# Altium PCB MARLIN.PcbDoc
Units mil, origin at the board's own origin, x right, y up, seen from the top; angles counter-clockwise.
Board outline 4120.29 x 4199.02 mil, 4 copper layers (Signal Layer 1, Signal Layer 2, Signal Layer 3, Signal Layer 4), stack 93.512 mil thick; 1 components, 2 nets, 7 pads, 42 vias.
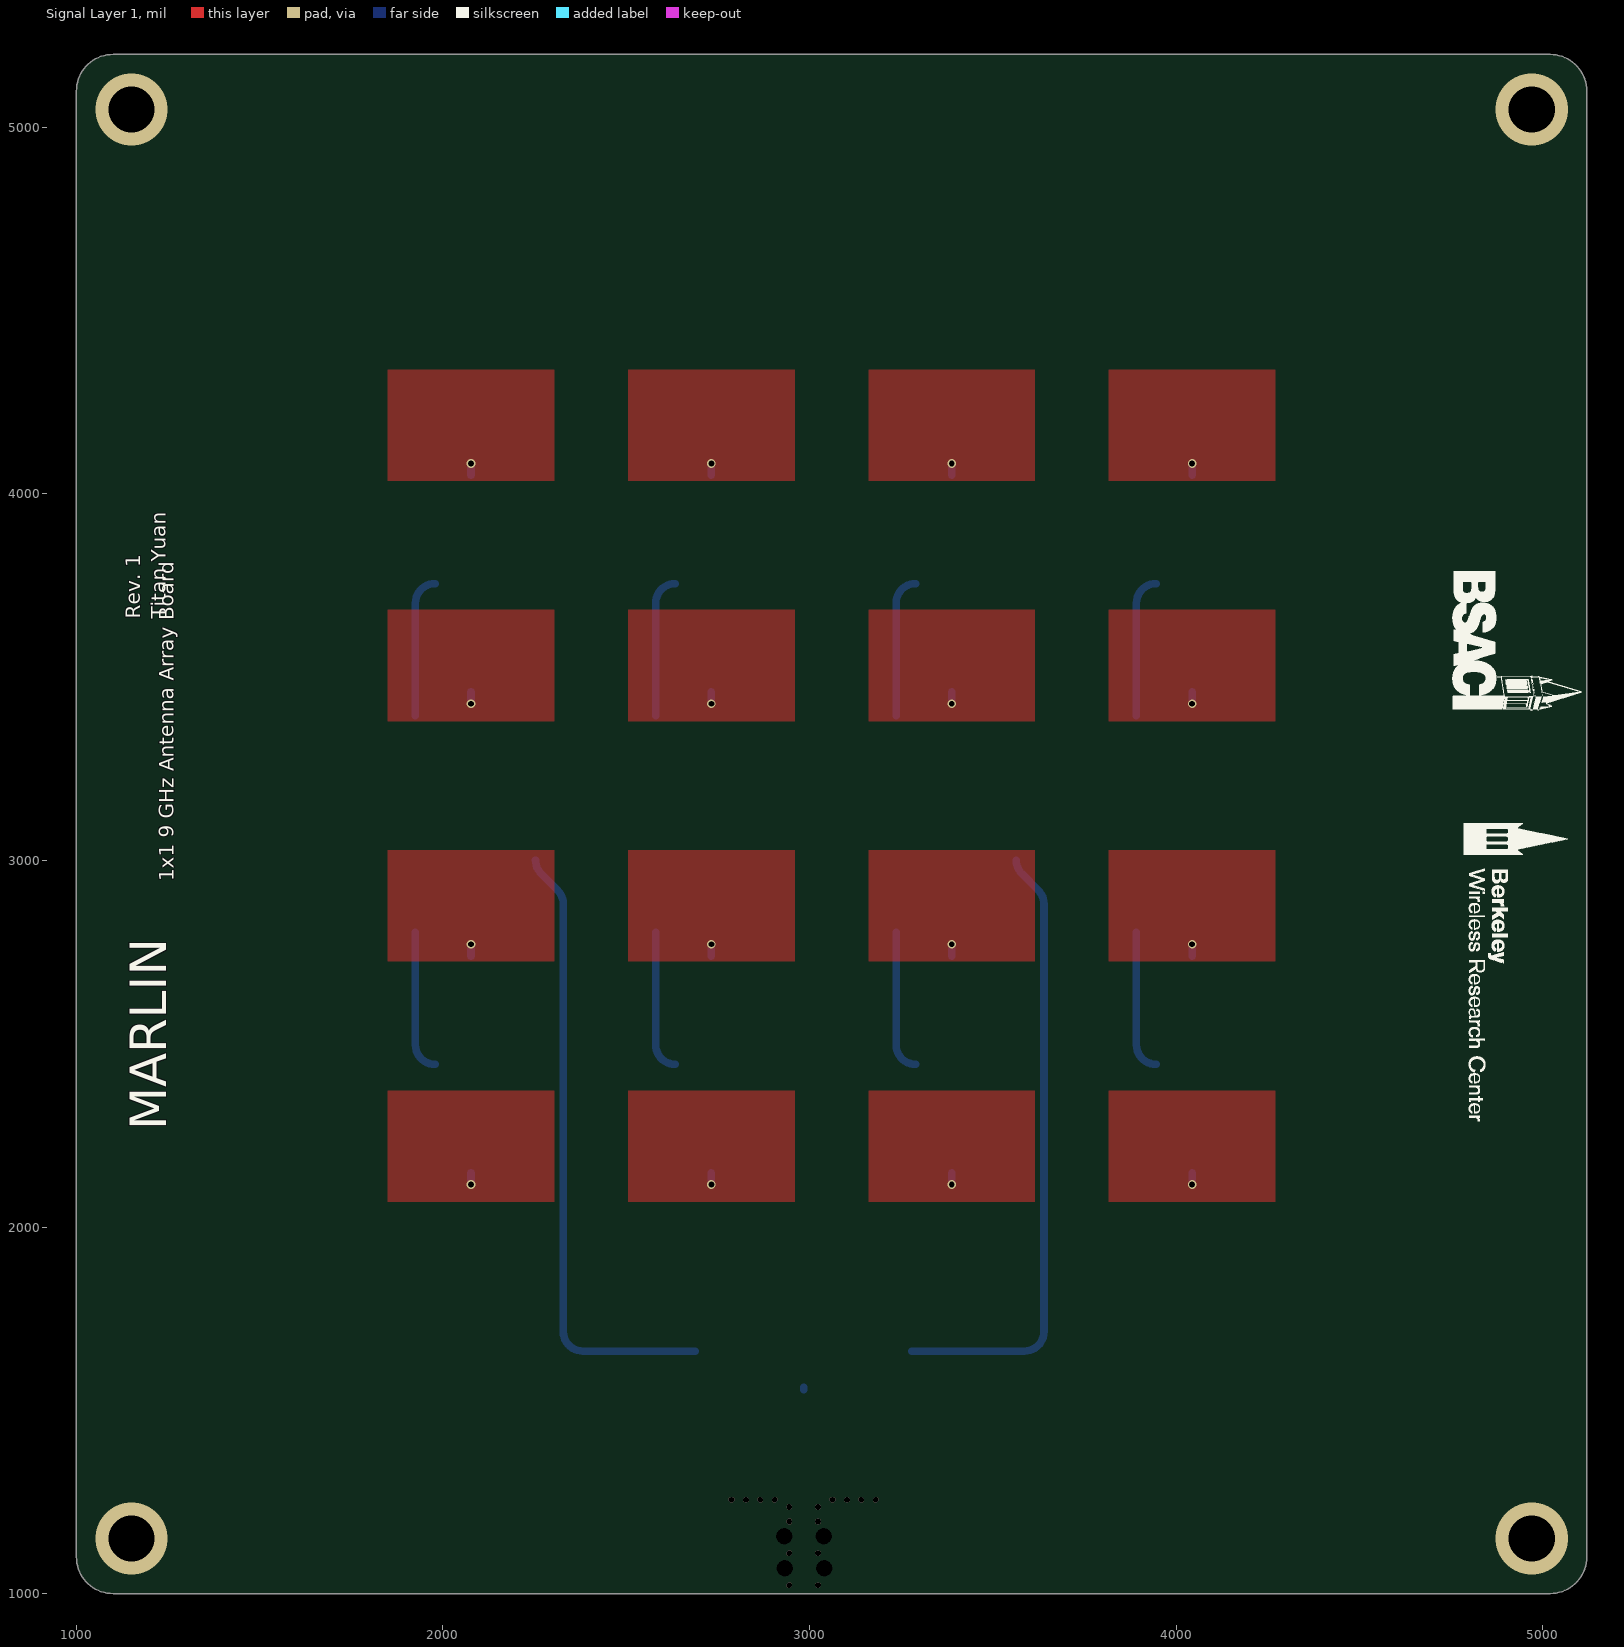
[diagram p0: Signal Layer 1 view]
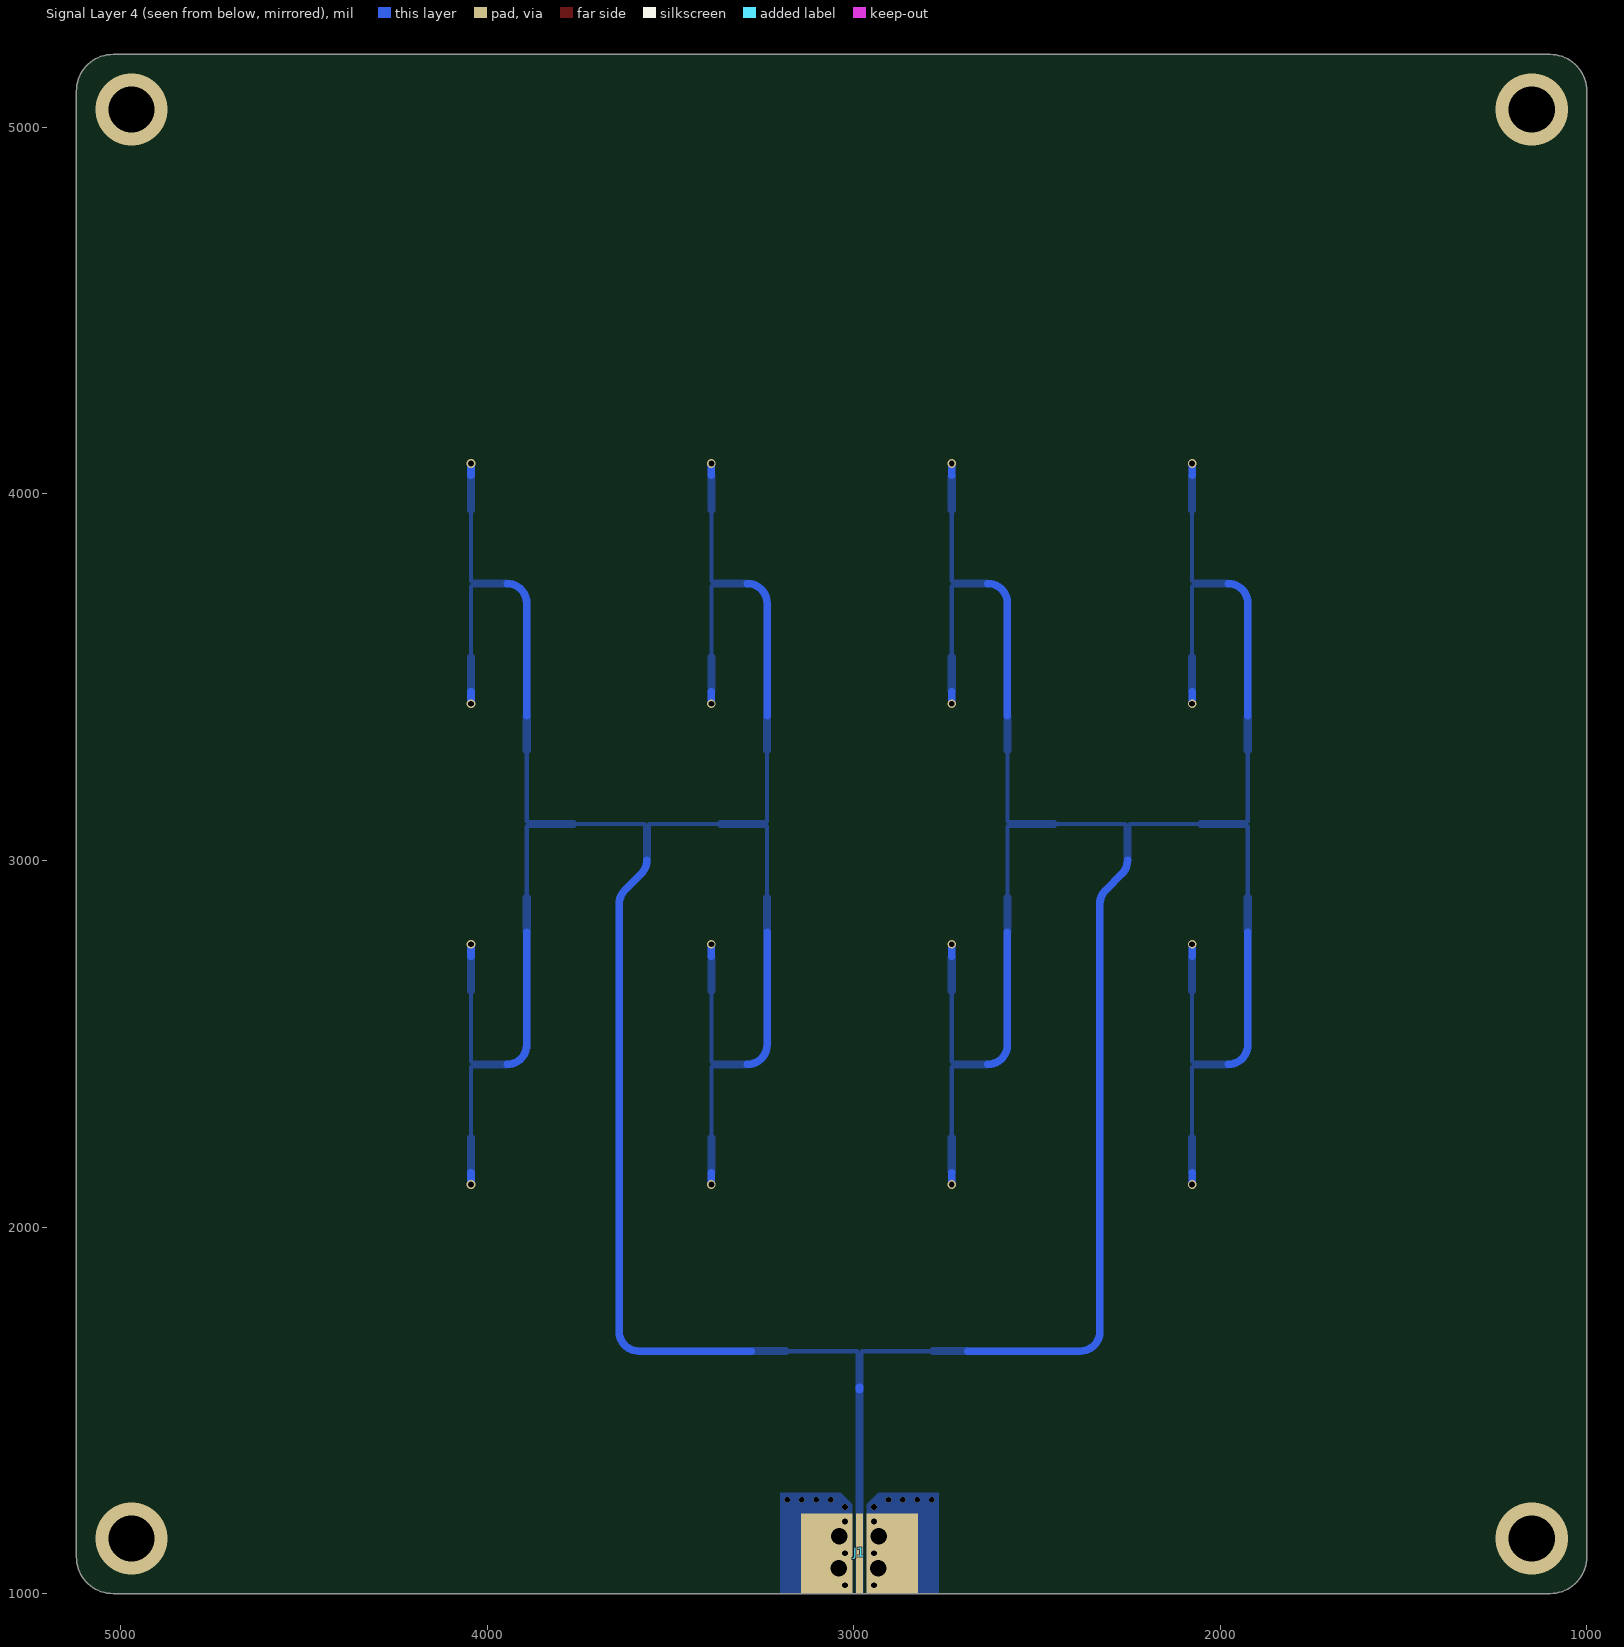
[diagram p1: Signal Layer 4 view, seen from below]
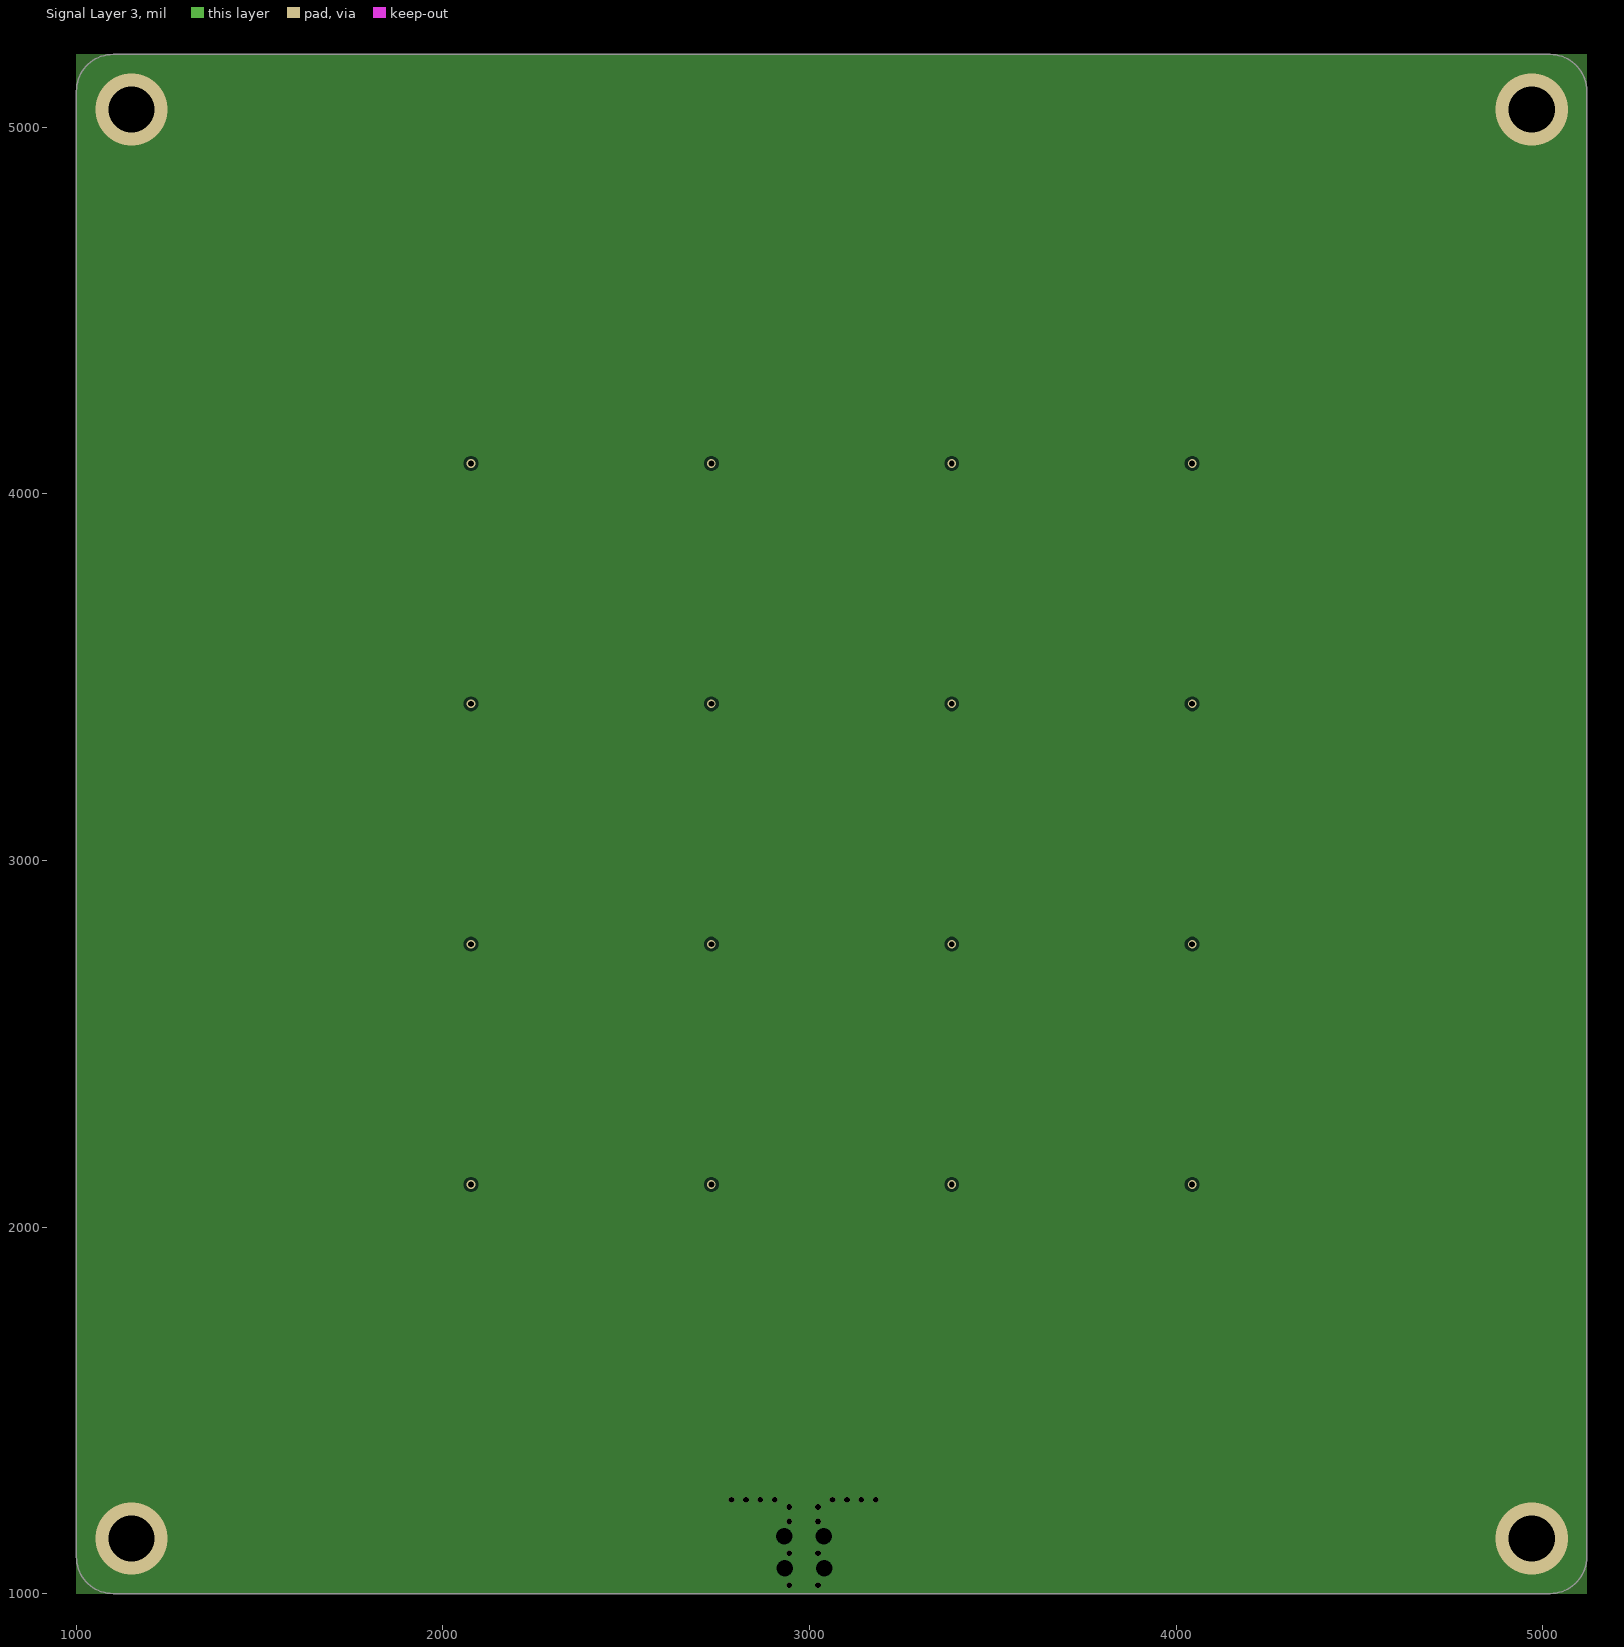
[diagram p2: Signal Layer 3]

## Layer stack, top to bottom
Top Solder: solder mask 0.5, Solder Resist, Dk 3.5
Signal Layer 1: signal copper 1.378
Core 1: core 60, Rogers RO4350B, Dk 3.48
Signal Layer 2: signal copper 1.378
Prepreg 1: prepreg 18, Rogers RO4450F Prepreg, Dk 3.52
Signal Layer 3: signal copper 1.378
Core 2: core 10, Rogers RO4350B, Dk 3.48
Signal Layer 4: signal copper 1.378
Bottom Solder: solder mask 0.5, Solder Resist, Dk 3.5

## Board outline
1100,1000 cw(c1100,1100) 1000,1100 1000,5099.02 cw(c1100,5099.02) 1100,5199.02 5020.28,5199.02 5020.29,5199.02 cw(c5020.29,5099.02) 5120.29,5099.02 5120.29,1099.72 5120.29,1100 cw(c5020.29,1100) 5020.29,1000

## Design rules (kind name [scope] priority, off if disabled: settings)
Clearance [All] p1: gap=7.87 ignorepadtopadclearanceinfootprint=FALSE except(0: Arc-Fill Arc-Poly Arc-Region Track-Fill Track-Poly Track-Region)
PolygonConnect [All] p1: connectstyle=Direct reliefconductorwidth=10 reliefentries=4 polygonreliefangle="90 Angle" airgapwidth=10
RoutingVias [All] p1: holewidth=28 width=50 viastyle="Through Hole" minholewidth=28 minwidth=50 maxholewidth=28 maxwidth=50
SolderMaskExpansion [All] p1: expansion=0 istentingtop=FALSE
SupplyNets "Schematic Supply Nets" [InNet('GND')] p1: voltage=0.000
Width "50 Ω" [InNetClass('50 Ω')] p1: maxlimit=20.76 minlimit=20.76 preferedwidth=20.76
Width [All] p2: maxlimit=10 minlimit=10 preferedwidth=10
30 further rules are at their usual default settings.

## Classes and differential pairs
net class "50 Ω": ANTENNA_1

## Components (designator, comment, footprint, x,y, rotation, side; value= is the part's Value field where it differs from the comment)
J1 "901-10512-1" 901-10512-1 2983.9,1000 r90 bottom

## Footprints (in the part's own frame and the unit in brackets; to place one, negate y for a bottom-side part, rotate by r counter-clockwise, add the part's x,y. Pads: shape width x height; smd on the part's side, far side on the other; paste and mask are expansions set on the pad)
901-10512-1 [mm] "SMA PCB End Launch Straight Jack 50 Ohm 0.085 Square Flange High Frequency 0.015 Pin"
  rect 5.54x0.49 smd: 1(2.77,0)
  round 0 hole 1.14: 2(1.75,-1.3) 2(1.75,1.435) 2(3.96,-1.335) 2(3.96,1.4)
  rect 5.54x3.564 smd: 2(2.77,-2.283) 2(2.77,2.283)
  body extent -9.53,-3.18 4.55,3.18, height 3.36

## Part data
J1: "RF / Coaxial Connector, SMA Coaxial, Straight Flanged Jack, Solder, 50 ohm, Beryllium Copper", Case/Package=SMA, Clock Frequency=26.5GHz, Manufacturer=Amphenol, Max Operating Temperature=165°C, Maximum Frequency="26.5 GHz", Min Operating Temperature=-65°C, Supplier Part Number=ARF2501-ND, Voltage Rating=170V, Category="RF / Coaxial Connectors", ComponentLink1Description=https://datasheet.octopart.com:443/901-10512-1-Amphenol-RF-datasheet-67291281.pdf?src-supplier=TME, ComponentLink1URL=https://datasheet.octopart.com:443/901-10512-1-Amphenol-RF-datasheet-67291281.pdf?src-supplier=TME, ComponentLink2Description=https://datasheet.octopart.com:443/901-10512-1-Amphenol-datasheet-151206439.pdf?src-supplier=IHS, ComponentLink2URL=https://datasheet.octopart.com:443/901-10512-1-Amphenol-datasheet-151206439.pdf?src-supplier=IHS, ComponentLink3Description=https://datasheet.octopart.com:443/901-10512-1-Amphenol-RF-datasheet-67291285.pdf?src-supplier=Newark, ComponentLink3URL=https://datasheet.octopart.com:443/901-10512-1-Amphenol-RF-datasheet-67291285.pdf?src-supplier=Newark, ComponentLink4Description=https://datasheet.octopart.com:443/901-10512-1-Amphenol-RF-datasheet-114836026.pdf?src-supplier=RS+(Formerly+Allied+Electronics), ComponentLink4URL=https://datasheet.octopart.com:443/901-10512-1-Amphenol-RF-datasheet-114836026.pdf?src-supplier=RS+(Formerly+Allied+Electronics), ComponentLink5Description=https://datasheet.octopart.com:443/901-10512-1-Amphenol-RF-datasheet-177020667.pdf?src-supplier=Burklin+Elektronik, ComponentLink5URL=https://datasheet.octopart.com:443/901-10512-1-Amphenol-RF-datasheet-177020667.pdf?src-supplier=Burklin+Elektronik, ComponentLink6Description=https://datasheet.octopart.com:443/901-10512-1-Amphenol-RF-datasheet-181430700.pdf?src-supplier=JRH+Electronics, ComponentLink6URL=https://datasheet.octopart.com:443/901-10512-1-Amphenol-RF-datasheet-181430700.pdf?src-supplier=JRH+Electronics, Connector Type="SMA, Socket", Contact Material=Copper, Fastening Type=Threaded, Impedance=50Ω, Lifecycle Status=Production, Manufacturer Part Number=901-10512-1, Mounting Technology="Edge, Through Hole", Orientation=Straight, Pricing="1=11.3, 10=9.599, 25=8.9976, 50=8.568, 100=8.159, 300=7.55083, 500=7.28374, 1000=6.93654 (USD)", RoHS=Compliant, Stock=96, Supplier=DigiKey, Termination=Solder

## Via types
v1: diameter 15.75, hole 15.75, Signal Layer 1 to Signal Layer 4, tented both sides, 16 vias
v2: diameter 23.62, hole 15.75, Signal Layer 1 to Signal Layer 4, tented both sides, 16 vias
v3: diameter 15.75, hole 15.75, Signal Layer 1 to Signal Layer 4, 6 vias
v4: diameter 196.85, hole 125.98, Signal Layer 1 to Signal Layer 4, 4 vias

## Nets (pads, with @x,y where several pads share a name; then routed paths per layer and width w, separated by ;. In a path a pad name is that pad's centre, name@x,y a point inside that pad or via, vN(x,y) a via of type N, cw(c..) or ccw(c..) an arc to the next point about the centre after c; other vN are vias at no path point)
ANTENNA_1: J1.1 | length 7064.6
  Signal Layer 4 w20.76: 1924.72,2804.28 1924.72,2497.25 ccw(c1978.15,2497.25) 1978.15,2443.82 ; 1924.72,3394.83 1924.72,3701.84 cw(c1978.15,3701.84) 1978.15,3755.27 ; v2@2076.47,2116.09 v2(2076.57,2115.98) 2076.57,2148.55 ; v2@2076.47,4083 v2(2076.57,4083.11) 2076.57,4050.55 ; 2076.57,2739.1 v2(2076.57,2771.69) ; v2(2076.57,3427.4) 2076.57,3460 ; 2252.57,3001.13 ccw(c2306,3001.13) 2268.22,2963.35 2312.54,2919.03 cw(c2274.76,2881.25) 2328.19,2881.25 2328.19,1714.85 ccw(c2381.62,1714.85) 2381.62,1661.42 2688.62,1661.42 ; 2580.43,2804.28 2580.43,2497.25 ccw(c2633.86,2497.25) 2633.86,2443.82 ; 2580.43,3394.83 2580.43,3701.84 cw(c2633.86,3701.84) 2633.86,3755.27 ; v2@2732.18,2116.09 v2(2732.28,2115.98) 2732.28,2148.55 ; v2@2732.18,4083 v2(2732.28,4083.11) 2732.28,4050.55 ; 2732.28,2739.1 v2(2732.28,2771.69) ; v2(2732.28,3427.4) 2732.28,3460 ; 2983.9,1556.3 2983.9,1562.99 ; 3236.14,2804.28 3236.14,2497.25 ccw(c3289.57,2497.25) 3289.57,2443.82 ; 3236.14,3394.83 3236.14,3701.84 cw(c3289.57,3701.84) 3289.57,3755.27 ; 3279.17,1661.42 3586.18,1661.42 ccw(c3586.18,1714.85) 3639.61,1714.85 3639.61,2881.25 ccw(c3586.18,2881.25) 3623.96,2919.03 3579.64,2963.35 cw(c3617.42,3001.13) 3563.99,3001.13 ; v2@3387.88,2116.09 v2(3387.99,2115.98) 3387.99,2148.55 ; v2@3387.88,4083 v2(3387.99,4083.11) 3387.99,4050.55 ; 3387.99,2739.1 v2(3387.99,2771.69) ; v2(3387.99,3427.4) 3387.99,3460 ; 3891.85,2804.28 3891.85,2497.25 ccw(c3945.28,2497.25) 3945.28,2443.82 ; 3891.85,3394.83 3891.85,3701.84 cw(c3945.28,3701.84) 3945.28,3755.27 ; v2@4043.59,2116.09 v2(4043.7,2115.98) 4043.7,2148.55 ; v2@4043.59,4083 v2(4043.7,4083.11) 4043.7,4050.55 ; 4043.7,2739.1 v2(4043.7,2771.69) ; v2(4043.7,3427.4) 4043.7,3460
GND: J1.2
  other v1: 2944.49,1022.83 3023.31,1022.83 2944.49,1109.84 3023.31,1109.84 2944.49,1196.85 3023.31,1196.85 2944.49,1236.22 3023.31,1236.22 2787.01,1255.91 2826.38,1255.91 2865.75,1255.91 2905.12,1255.91 3062.68,1255.91 3102.05,1255.91 3141.42,1255.91 3180.79,1255.91
  other v3: 2944.49,1022.83 3023.31,1022.83 2944.49,1109.84 3023.31,1109.84 2944.49,1196.85 3023.31,1196.85
  other v4: 1150,1150 4970.29,1150 1150,5049.02 4970.29,5049.02

## Polygon pours and split planes (outlines as drawn)
GND on Signal Layer 4 "GND_L04_P230" (solid, pour order 230): 2767.32,1000 2767.32,1275.59 2932.68,1275.59 2964.17,1244.09 2964.17,1000
GND on Signal Layer 4 "GND_L04_P231" (solid, pour order 231): 3003.62,1155.91 3003.62,1244.09 3035.12,1275.59 3200.47,1275.59 3200.47,1000 3003.62,1000
ANTENNA_1 on Signal Layer 4 "ANTENNA_1_L04_P232" (solid, pour order 232): 2974.25,1244.09 2973.52,1244.83 2973.52,1556.3 2994.28,1556.3 2994.28,1244.83 2993.54,1244.09 2993.54,1000 2974.25,1000
ANTENNA_1 on Signal Layer 4 "ANTENNA_1_L04_P276" (solid, pour order 276): 2973.52,1562.99 2994.28,1562.99 2994.28,1661.42 2973.52,1661.42
ANTENNA_1 on Signal Layer 4 "ANTENNA_1_L04_P277" (solid, pour order 277): 2983.9,1661.42 2989.04,1656.28 3175.45,1656.28 3180.69,1651.04 3279.17,1651.04 3279.17,1671.8 3180.69,1671.8 3175.45,1666.56 2989.04,1666.56
ANTENNA_1 on Signal Layer 4 "ANTENNA_1_L04_P278" (solid, pour order 278): 2688.62,1651.04 2688.62,1671.8 2787.1,1671.8 2792.34,1666.56 2978.76,1666.56 2983.9,1661.42 2978.76,1656.28 2792.34,1656.28 2787.1,1651.04
ANTENNA_1 on Signal Layer 4 "ANTENNA_1_L04_P255" (solid, pour order 255): 3387.99,2443.82 3382.85,2438.69 3382.85,2252.27 3377.61,2247.03 3377.61,2148.55 3398.37,2148.55 3398.37,2247.03 3393.13,2252.27 3393.13,2438.69
ANTENNA_1 on Signal Layer 4 "ANTENNA_1_L04_P274" (solid, pour order 274): 3268.72,3089.18 3268.72,3109.93 3367.2,3109.93 3372.44,3104.69 3558.85,3104.69 3563.99,3099.56 3558.85,3094.42 3372.44,3094.42 3367.2,3089.18
ANTENNA_1 on Signal Layer 4 "ANTENNA_1_L04_P273" (solid, pour order 273): 3563.99,3099.56 3569.13,3094.42 3755.55,3094.42 3760.79,3089.18 3859.27,3089.18 3859.27,3109.93 3760.79,3109.93 3755.55,3104.69 3569.13,3104.69
ANTENNA_1 on Signal Layer 4 "ANTENNA_1_L04_P272" (solid, pour order 272): 3553.61,3001.13 3574.37,3001.13 3574.37,3099.56 3553.61,3099.56
ANTENNA_1 on Signal Layer 4 "ANTENNA_1_L04_P271" (solid, pour order 271): 1957.3,3089.18 1957.3,3109.93 2055.78,3109.93 2061.02,3104.69 2247.44,3104.69 2252.57,3099.56 2247.44,3094.42 2061.02,3094.42 2055.78,3089.18
ANTENNA_1 on Signal Layer 4 "ANTENNA_1_L04_P270" (solid, pour order 270): 2252.57,3099.56 2257.71,3094.42 2444.13,3094.42 2449.37,3089.18 2547.85,3089.18 2547.85,3109.93 2449.37,3109.93 2444.13,3104.69 2257.71,3104.69
ANTENNA_1 on Signal Layer 4 "ANTENNA_1_L04_P269" (solid, pour order 269): 2242.2,3001.13 2262.95,3001.13 2262.95,3099.56 2242.2,3099.56
ANTENNA_1 on Signal Layer 4 "ANTENNA_1_L04_P233" (solid, pour order 233): 2023.15,3089.18 2023.15,3109.93 1924.72,3109.93 1924.72,3089.18
ANTENNA_1 on Signal Layer 4 "ANTENNA_1_L04_P234" (solid, pour order 234): 1924.72,3099.56 1929.86,3104.69 1929.86,3291.11 1935.1,3296.35 1935.1,3394.83 1914.34,3394.83 1914.34,3296.35 1919.58,3291.11 1919.58,3104.69
ANTENNA_1 on Signal Layer 4 "ANTENNA_1_L04_P235" (solid, pour order 235): 1935.1,2804.28 1914.34,2804.28 1914.34,2902.76 1919.58,2908 1919.58,3094.42 1924.72,3099.56 1929.86,3094.42 1929.86,2908 1935.1,2902.76
ANTENNA_1 on Signal Layer 4 "ANTENNA_1_L04_P268" (solid, pour order 268): 4033.32,4050.55 4054.08,4050.55 4054.08,3952.07 4048.84,3946.83 4048.84,3760.41 4043.7,3755.27 4038.56,3760.41 4038.56,3946.83 4033.32,3952.07
ANTENNA_1 on Signal Layer 4 "ANTENNA_1_L04_P267" (solid, pour order 267): 4043.7,3755.27 4038.56,3750.13 4038.56,3563.72 4033.32,3558.48 4033.32,3460 4054.08,3460 4054.08,3558.48 4048.84,3563.72 4048.84,3750.13
ANTENNA_1 on Signal Layer 4 "ANTENNA_1_L04_P266" (solid, pour order 266): 3945.28,3765.65 3945.28,3744.89 4043.7,3744.89 4043.7,3765.65
ANTENNA_1 on Signal Layer 4 "ANTENNA_1_L04_P265" (solid, pour order 265): 4033.32,2739.1 4054.08,2739.1 4054.08,2640.62 4048.84,2635.38 4048.84,2448.96 4043.7,2443.82 4038.56,2448.96 4038.56,2635.38 4033.32,2640.62
ANTENNA_1 on Signal Layer 4 "ANTENNA_1_L04_P264" (solid, pour order 264): 4043.7,2443.82 4038.56,2438.69 4038.56,2252.27 4033.32,2247.03 4033.32,2148.55 4054.08,2148.55 4054.08,2247.03 4048.84,2252.27 4048.84,2438.69
ANTENNA_1 on Signal Layer 4 "ANTENNA_1_L04_P263" (solid, pour order 263): 3945.28,2454.2 3945.28,2433.45 4043.7,2433.45 4043.7,2454.2
ANTENNA_1 on Signal Layer 4 "ANTENNA_1_L04_P262" (solid, pour order 262): 3881.47,3394.83 3902.23,3394.83 3902.23,3296.35 3896.98,3291.11 3896.98,3104.69 3891.85,3099.56 3886.71,3104.69 3886.71,3291.11 3881.47,3296.35
ANTENNA_1 on Signal Layer 4 "ANTENNA_1_L04_P261" (solid, pour order 261): 3891.85,3099.56 3886.71,3094.42 3886.71,2908 3881.47,2902.76 3881.47,2804.28 3902.23,2804.28 3902.23,2902.76 3896.98,2908 3896.98,3094.42
ANTENNA_1 on Signal Layer 4 "ANTENNA_1_L04_P260" (solid, pour order 260): 3793.42,3109.93 3793.42,3089.18 3891.85,3089.18 3891.85,3109.93
ANTENNA_1 on Signal Layer 4 "ANTENNA_1_L04_P259" (solid, pour order 259): 3377.61,4050.55 3398.37,4050.55 3398.37,3952.07 3393.13,3946.83 3393.13,3760.41 3387.99,3755.27 3382.85,3760.41 3382.85,3946.83 3377.61,3952.07
ANTENNA_1 on Signal Layer 4 "ANTENNA_1_L04_P258" (solid, pour order 258): 3387.99,3755.27 3382.85,3750.13 3382.85,3563.72 3377.61,3558.48 3377.61,3460 3398.37,3460 3398.37,3558.48 3393.13,3563.72 3393.13,3750.13
ANTENNA_1 on Signal Layer 4 "ANTENNA_1_L04_P257" (solid, pour order 257): 3289.57,3765.65 3289.57,3744.89 3387.99,3744.89 3387.99,3765.65
ANTENNA_1 on Signal Layer 4 "ANTENNA_1_L04_P256" (solid, pour order 256): 3377.61,2739.1 3398.37,2739.1 3398.37,2640.62 3393.13,2635.38 3393.13,2448.96 3387.99,2443.82 3382.85,2448.96 3382.85,2635.38 3377.61,2640.62
ANTENNA_1 on Signal Layer 4 "ANTENNA_1_L04_P254" (solid, pour order 254): 3289.57,2454.2 3289.57,2433.45 3387.99,2433.45 3387.99,2454.2
ANTENNA_1 on Signal Layer 4 "ANTENNA_1_L04_P253" (solid, pour order 253): 3246.52,2804.28 3225.76,2804.28 3225.76,2902.76 3231,2908 3231,3094.42 3236.14,3099.56 3241.28,3094.42 3241.28,2908 3246.52,2902.76
ANTENNA_1 on Signal Layer 4 "ANTENNA_1_L04_P252" (solid, pour order 252): 3236.14,3099.56 3241.28,3104.69 3241.28,3291.11 3246.52,3296.35 3246.52,3394.83 3225.76,3394.83 3225.76,3296.35 3231,3291.11 3231,3104.69
ANTENNA_1 on Signal Layer 4 "ANTENNA_1_L04_P251" (solid, pour order 251): 3334.56,3089.18 3334.56,3109.93 3236.14,3109.93 3236.14,3089.18
ANTENNA_1 on Signal Layer 4 "ANTENNA_1_L04_P250" (solid, pour order 250): 2721.9,4050.55 2742.66,4050.55 2742.66,3952.07 2737.42,3946.83 2737.42,3760.41 2732.28,3755.27 2727.15,3760.41 2727.15,3946.83 2721.9,3952.07
ANTENNA_1 on Signal Layer 4 "ANTENNA_1_L04_P249" (solid, pour order 249): 2732.28,3755.27 2727.15,3750.13 2727.15,3563.72 2721.9,3558.48 2721.9,3460 2742.66,3460 2742.66,3558.48 2737.42,3563.72 2737.42,3750.13
ANTENNA_1 on Signal Layer 4 "ANTENNA_1_L04_P248" (solid, pour order 248): 2633.86,3765.65 2633.86,3744.89 2732.28,3744.89 2732.28,3765.65
ANTENNA_1 on Signal Layer 4 "ANTENNA_1_L04_P247" (solid, pour order 247): 2721.9,2739.1 2742.66,2739.1 2742.66,2640.62 2737.42,2635.38 2737.42,2448.96 2732.28,2443.82 2727.15,2448.96 2727.15,2635.38 2721.9,2640.62
ANTENNA_1 on Signal Layer 4 "ANTENNA_1_L04_P246" (solid, pour order 246): 2732.28,2443.82 2727.15,2438.69 2727.15,2252.27 2721.9,2247.03 2721.9,2148.55 2742.66,2148.55 2742.66,2247.03 2737.42,2252.27 2737.42,2438.69
ANTENNA_1 on Signal Layer 4 "ANTENNA_1_L04_P245" (solid, pour order 245): 2633.86,2454.2 2633.86,2433.45 2732.28,2433.45 2732.28,2454.2
ANTENNA_1 on Signal Layer 4 "ANTENNA_1_L04_P244" (solid, pour order 244): 2570.05,3394.83 2590.81,3394.83 2590.81,3296.35 2585.57,3291.11 2585.57,3104.69 2580.43,3099.56 2575.29,3104.69 2575.29,3291.11 2570.05,3296.35
ANTENNA_1 on Signal Layer 4 "ANTENNA_1_L04_P243" (solid, pour order 243): 2580.43,3099.56 2575.29,3094.42 2575.29,2908 2570.05,2902.76 2570.05,2804.28 2590.81,2804.28 2590.81,2902.76 2585.57,2908 2585.57,3094.42
ANTENNA_1 on Signal Layer 4 "ANTENNA_1_L04_P242" (solid, pour order 242): 2482,3109.93 2482,3089.18 2580.43,3089.18 2580.43,3109.93
ANTENNA_1 on Signal Layer 4 "ANTENNA_1_L04_P241" (solid, pour order 241): 2066.2,4050.55 2086.95,4050.55 2086.95,3952.07 2081.71,3946.83 2081.71,3760.41 2076.57,3755.27 2071.44,3760.41 2071.44,3946.83 2066.2,3952.07
ANTENNA_1 on Signal Layer 4 "ANTENNA_1_L04_P240" (solid, pour order 240): 2076.57,3755.27 2071.44,3750.13 2071.44,3563.72 2066.2,3558.48 2066.2,3460 2086.95,3460 2086.95,3558.48 2081.71,3563.72 2081.71,3750.13
ANTENNA_1 on Signal Layer 4 "ANTENNA_1_L04_P239" (solid, pour order 239): 1978.15,3765.65 1978.15,3744.89 2076.57,3744.89 2076.57,3765.65
ANTENNA_1 on Signal Layer 4 "ANTENNA_1_L04_P238" (solid, pour order 238): 2066.2,2739.1 2086.95,2739.1 2086.95,2640.62 2081.71,2635.38 2081.71,2448.96 2076.57,2443.82 2071.44,2448.96 2071.44,2635.38 2066.2,2640.62
ANTENNA_1 on Signal Layer 4 "ANTENNA_1_L04_P237" (solid, pour order 237): 2076.57,2443.82 2071.44,2438.69 2071.44,2252.27 2066.2,2247.03 2066.2,2148.55 2086.95,2148.55 2086.95,2247.03 2081.71,2252.27 2081.71,2438.69
ANTENNA_1 on Signal Layer 4 "ANTENNA_1_L04_P236" (solid, pour order 236): 1978.15,2454.2 1978.15,2433.45 2076.57,2433.45 2076.57,2454.2
ANTENNA_1 on Signal Layer 1 "ANTENNA_1_L01_P208" (solid, pour order 208): 3161.07,2724.54 3161.07,3027.94 3614.92,3027.94 3614.92,2724.54
ANTENNA_1 on Signal Layer 1 "ANTENNA_1_L01_P202" (solid, pour order 202): 1849.65,2068.83 1849.65,2372.23 2303.5,2372.23 2303.5,2068.83
ANTENNA_1 on Signal Layer 1 "ANTENNA_1_L01_P209" (solid, pour order 209): 3816.78,2724.54 3816.78,3027.94 4270.62,3027.94 4270.62,2724.54
ANTENNA_1 on Signal Layer 1 "ANTENNA_1_L01_P213" (solid, pour order 213): 3816.78,3380.25 3816.78,3683.65 4270.62,3683.65 4270.62,3380.25
ANTENNA_1 on Signal Layer 1 "ANTENNA_1_L01_P212" (solid, pour order 212): 3161.07,3380.25 3161.07,3683.65 3614.92,3683.65 3614.92,3380.25
ANTENNA_1 on Signal Layer 1 "ANTENNA_1_L01_P211" (solid, pour order 211): 2505.36,3380.25 2505.36,3683.65 2959.21,3683.65 2959.21,3380.25
ANTENNA_1 on Signal Layer 1 "ANTENNA_1_L01_P207" (solid, pour order 207): 2505.36,2724.54 2505.36,3027.94 2959.21,3027.94 2959.21,2724.54
ANTENNA_1 on Signal Layer 1 "ANTENNA_1_L01_P205" (solid, pour order 205): 3816.78,2068.83 3816.78,2372.23 4270.62,2372.23 4270.62,2068.83
ANTENNA_1 on Signal Layer 1 "ANTENNA_1_L01_P204" (solid, pour order 204): 3161.07,2068.83 3161.07,2372.23 3614.92,2372.23 3614.92,2068.83
ANTENNA_1 on Signal Layer 1 "ANTENNA_1_L01_P203" (solid, pour order 203): 2505.36,2068.83 2505.36,2372.23 2959.21,2372.23 2959.21,2068.83
ANTENNA_1 on Signal Layer 1 "ANTENNA_1_L01_P217" (solid, pour order 217): 3816.78,4035.96 3816.78,4339.36 4270.62,4339.36 4270.62,4035.96
ANTENNA_1 on Signal Layer 1 "ANTENNA_1_L01_P216" (solid, pour order 216): 3161.07,4035.96 3161.07,4339.36 3614.92,4339.36 3614.92,4035.96
ANTENNA_1 on Signal Layer 1 "ANTENNA_1_L01_P215" (solid, pour order 215): 2505.36,4035.96 2505.36,4339.36 2959.21,4339.36 2959.21,4035.96
ANTENNA_1 on Signal Layer 1 "ANTENNA_1_L01_P214" (solid, pour order 214): 1849.65,4035.96 1849.65,4339.36 2303.5,4339.36 2303.5,4035.96
ANTENNA_1 on Signal Layer 1 "ANTENNA_1_L01_P210" (solid, pour order 210): 1849.65,3380.25 1849.65,3683.65 2303.5,3683.65 2303.5,3380.25
ANTENNA_1 on Signal Layer 1 "ANTENNA_1_L01_P206" (solid, pour order 206): 1849.65,2724.54 1849.65,3027.94 2303.5,3027.94 2303.5,2724.54
no net on Top Solder "NONET_L03_P000" (solid, pour order 0): 1393.7,5199.02 4726.57,5199.02 4726.57,1000 1393.7,1000
no net on Bottom Solder "NONET_L03_P001" (solid, pour order 1): 1393.7,5199.02 4726.57,5199.02 4726.57,1000 1393.7,1000
GND on Signal Layer 3 "GND_L03_P002" (solid, pour order 2): 1000,5199.02 5120.28,5199.02 5120.28,1000 1000,1000

## Silkscreen, mask and mechanical layers (free items; w line width, h text height)
Top Overlay:
  drawing of 41 lines, arcs and shapes, not listed
  text "Rev. 1" at 1173.97,3659.73 h40 r90
  text "Titan Yuan" at 1244.14,3659.73 h40 r90
  text "1x1 9 GHz Antenna Array Board" at 1265.24,2943.46 h40 r90
  text "MARLIN" at 1245.24,2263.46 h100 r90
Mechanical 1:
  lines w10: 5120.29,1099.72 5120.29,5099.02 ccw(c5020.29,5099.02) 5020.29,5199.02 1100,5199.02 ccw(c1100,5099.02) 1000,5099.02 1000,1100 ccw(c1100,1100) 1100,1000 5020.28,1000 ccw(c5020.29,1100) 5120.29,1100